# Altium PCB LM-CT-001.PcbDoc
Units mm, origin at the board's own origin, x right, y up, seen from the top; angles counter-clockwise.
Board outline 15 x 61.98 mm, 5 copper layers (Top Layer, Guard, Signal Layer 1, GND, Bottom Layer), stack 0.941 mm thick; 79 components, 63 nets, 279 pads, 15 vias.
Unrouted connection lines stored in the file: 200.
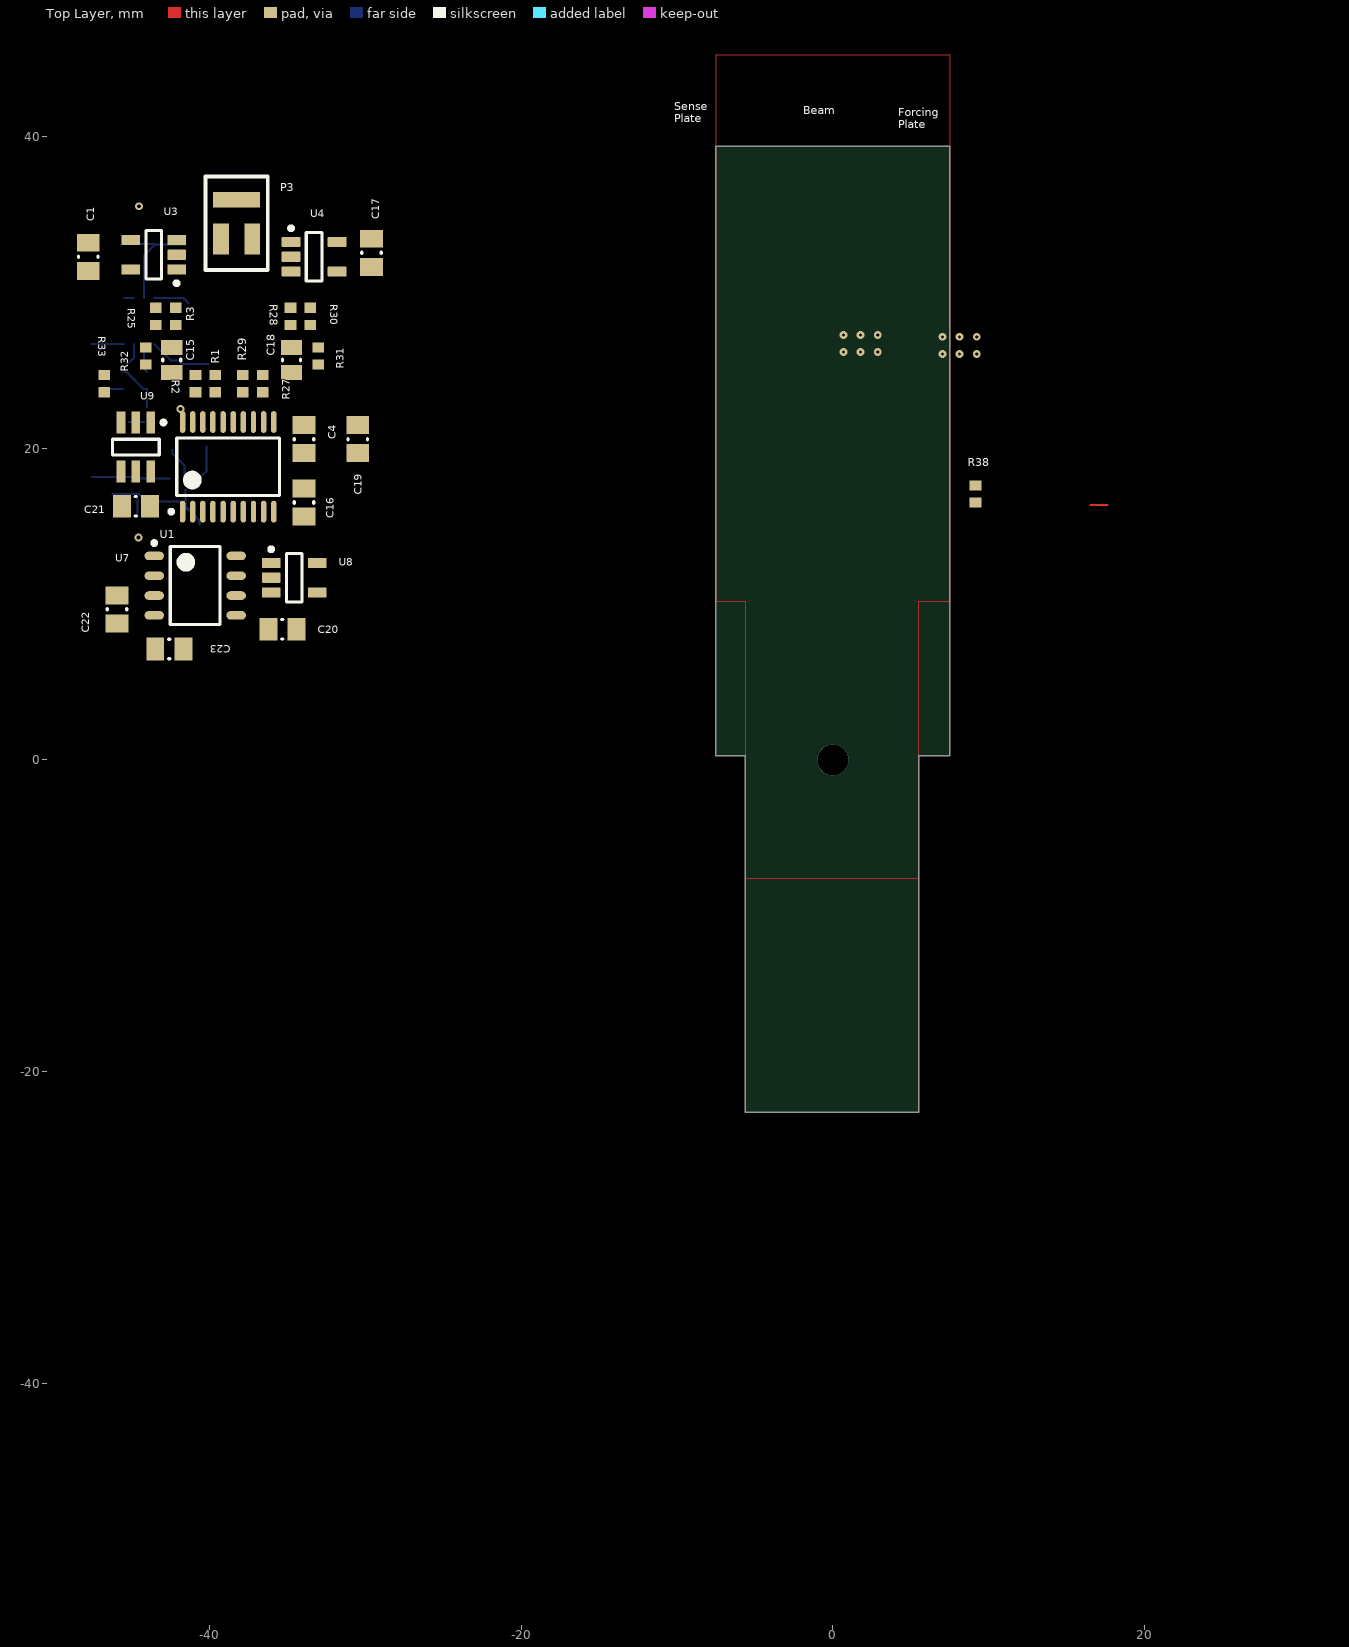
[diagram p0: Top Layer view]
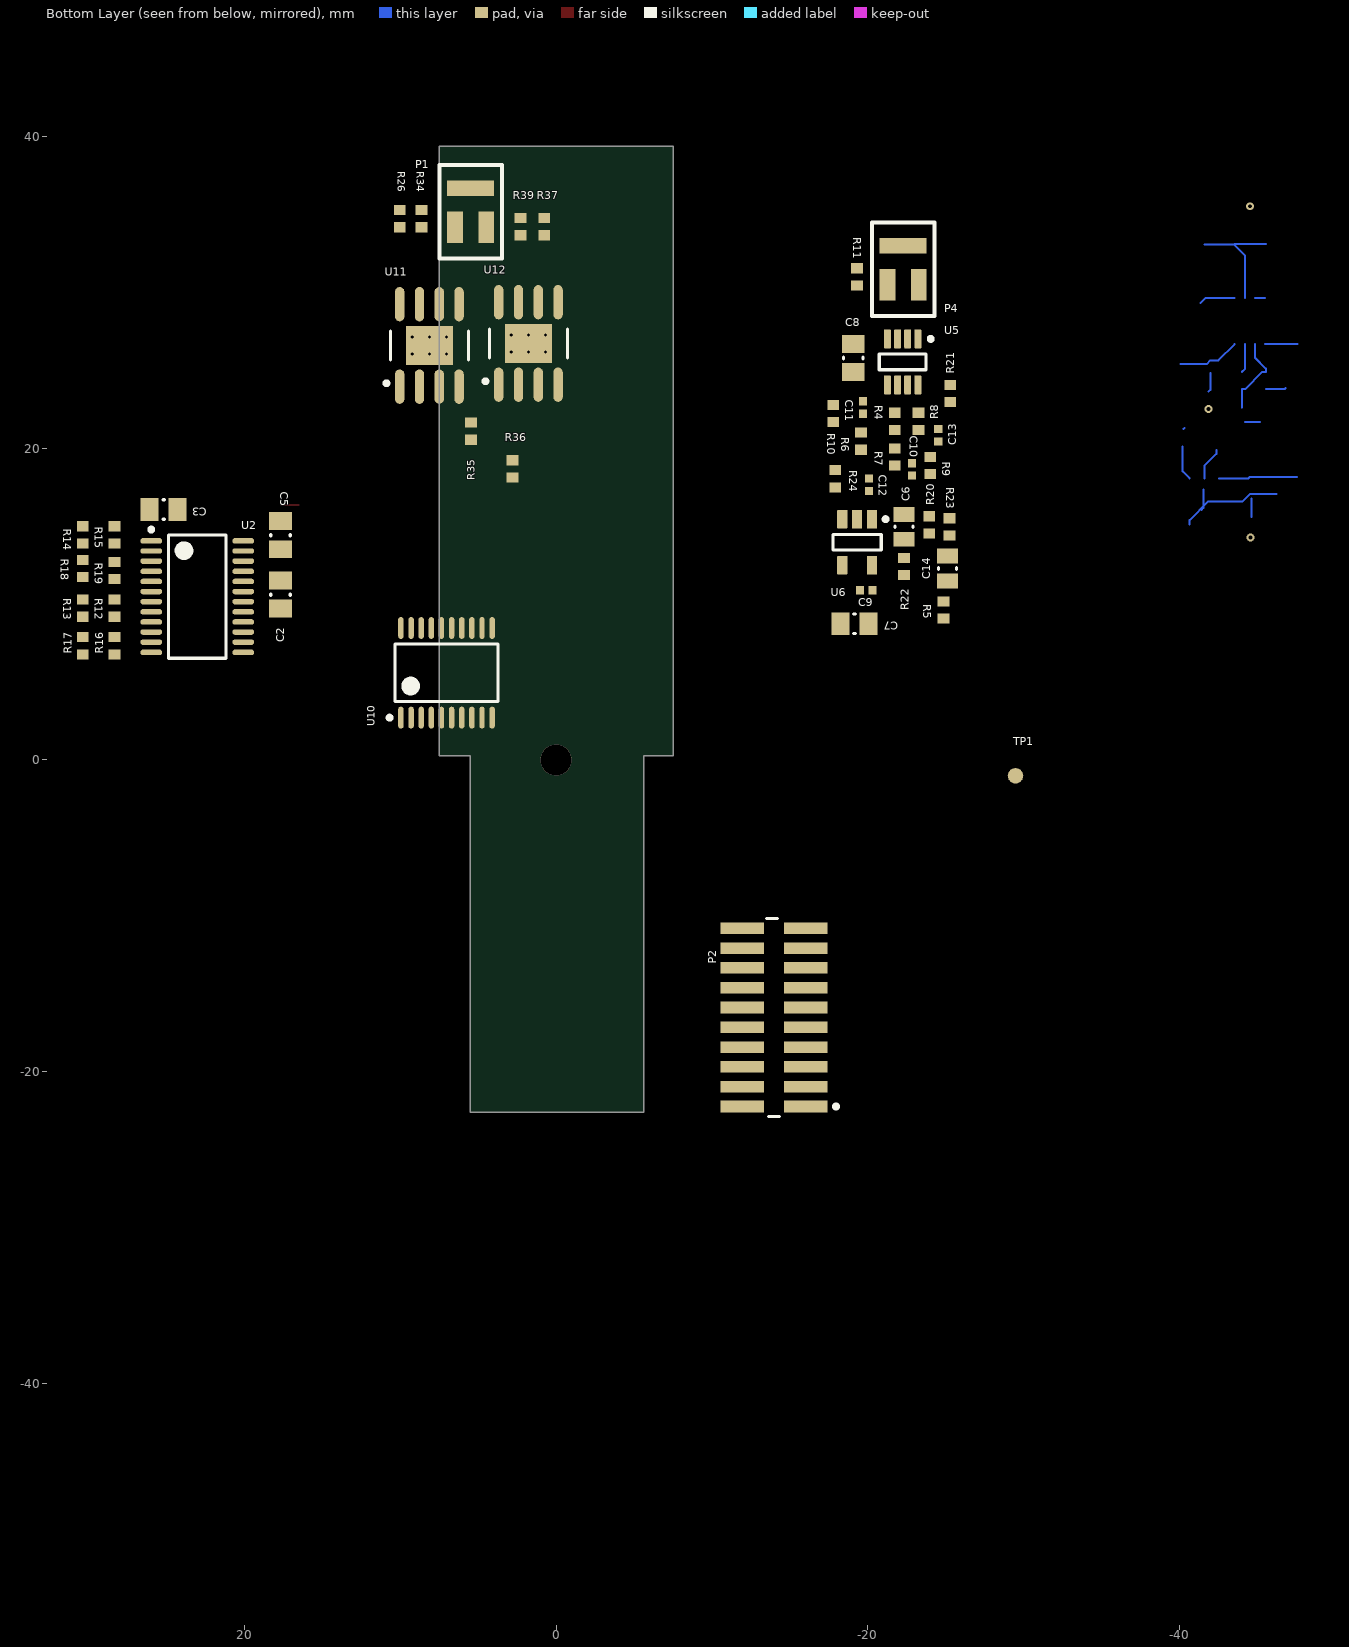
[diagram p1: Bottom Layer view, seen from below]
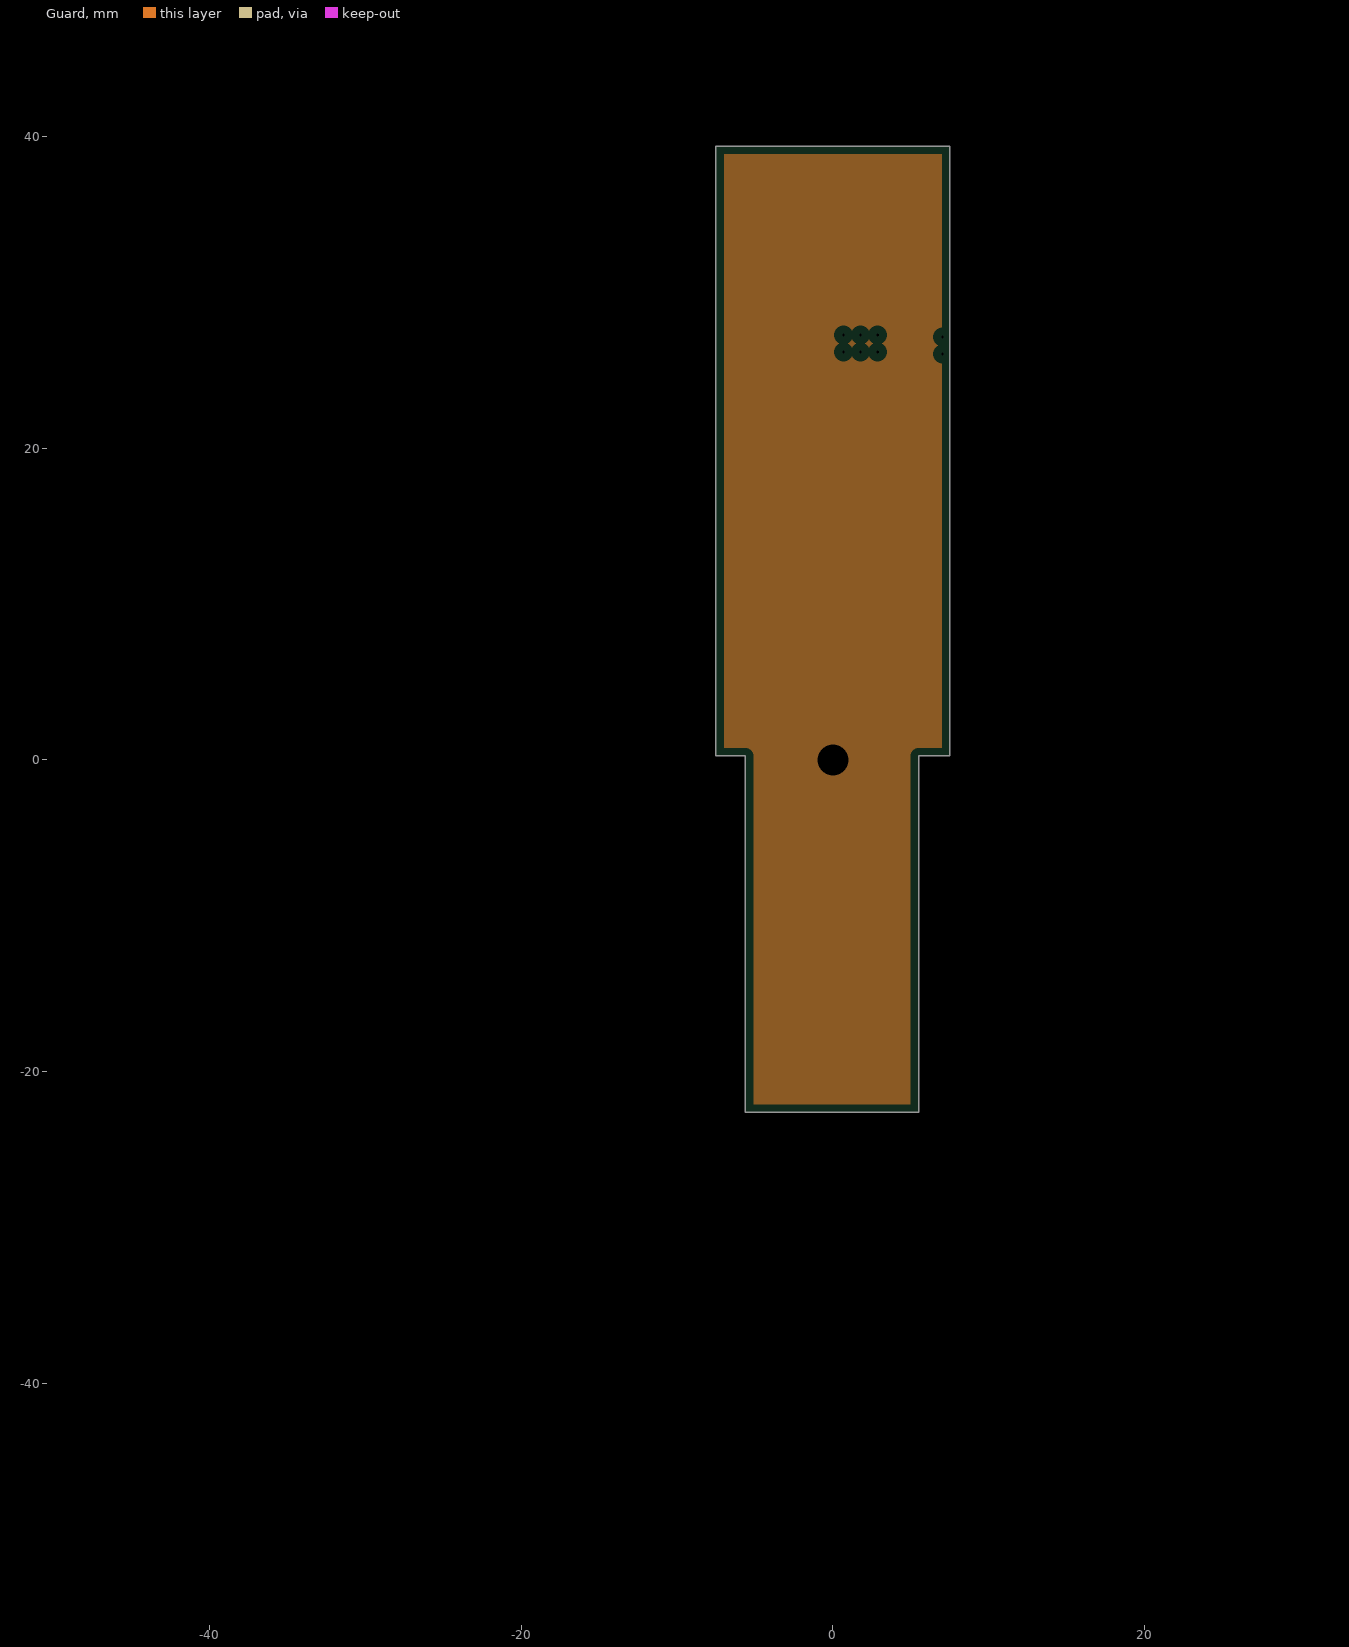
[diagram p2: Guard, clearances drawn from the general rule]
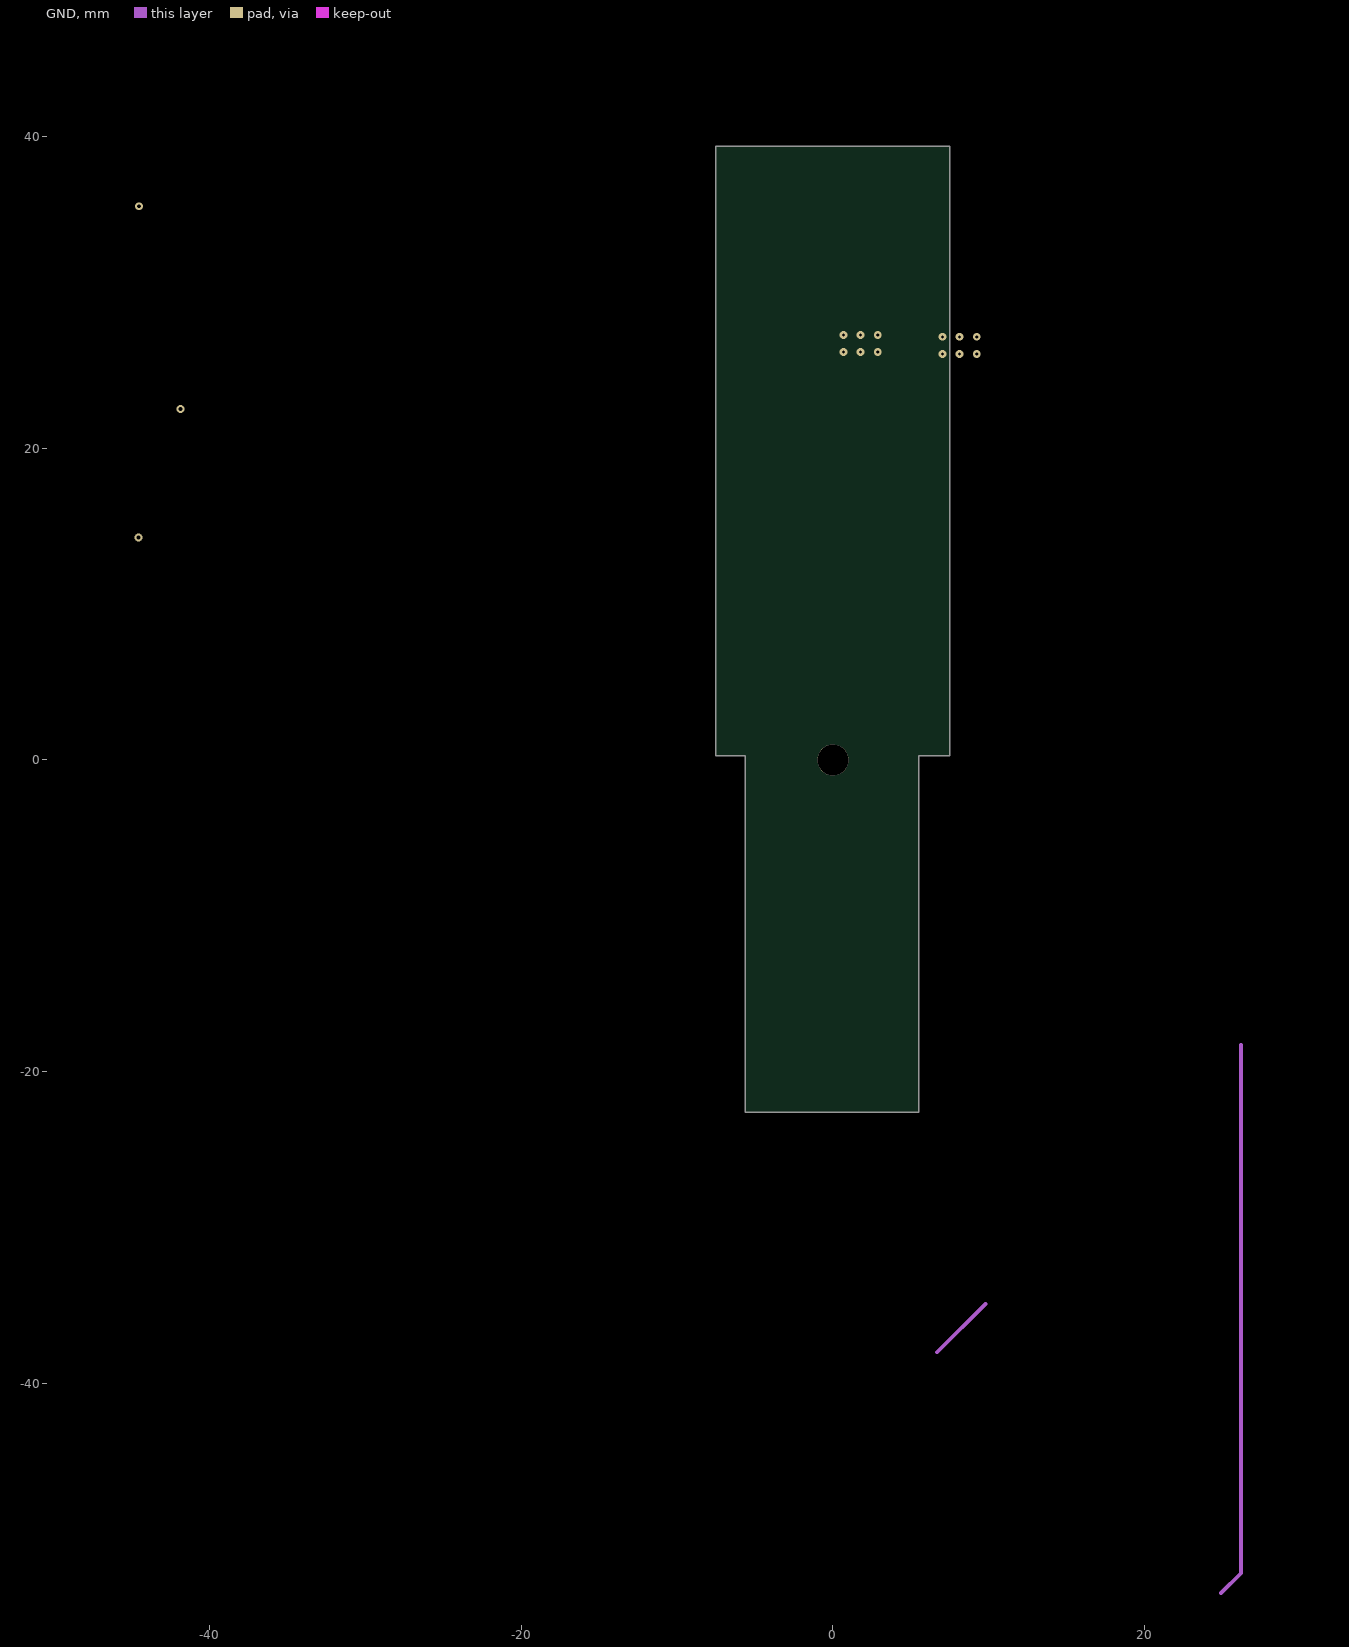
[diagram p3: GND]

## Layer stack, top to bottom
Top Solder: solder mask 0.0102, Solder Resist, Dk 3.5
Top Layer: signal copper 0.0356
Dielectric 1: core 0.254, FR-4, Dk 4.2
Guard: plane copper 0.036, net Guard
Dielectric 4: prepreg 0.127, Dk 4.2
Signal Layer 1: signal copper 0.036
Dielectric 3: core 0.254, Dk 4.2
GND: signal copper 0.036
Dielectric 2: prepreg 0.127, Dk 4.2
Bottom Layer: signal copper 0.0356
Bottom Solder: solder mask 0.0102, Solder Resist, Dk 3.5

## Board outline
7.5,0.254 5.494,0.254 5.494,-22.606 -5.606,-22.606 -5.606,0.254 -7.5,0.254 -7.5,39.37 7.5,39.37

## Design rules (kind name [scope] priority, off if disabled: settings)
Clearance [All] p1: gap=0.127 ignorepadtopadclearanceinfootprint=FALSE except(0: Arc-Hole Track-Hole SMDPad-Hole THPad-Hole Via-Hole Fill-Hole Poly-Hole Region-Hole Text-Hole)
DiffPairsRouting [All] p1: maxlimit=0.254 minlimit=0.254 mostfreqgap=0.254 toplayer_minwidth=0.381 toplayer_maxwidth=0.381 toplayer_prefwidth=0.381 midlayer1_minwidth=0.381 midlayer1_maxwidth=0.381 midlayer1_prefwidth=0.381 midlayer2_minwidth=0.381 midlayer2_maxwidth=0.381 midlayer2_prefwidth=0.381 bottomlayer_minwidth=0.381 bottomlayer_maxwidth=0.381 bottomlayer_prefwidth=0.381 maxuncoupledlength=12.7
HoleToHoleClearance [All] p1: gap=0.127 allowstackedmicrovias=TRUE
MinimumSolderMaskSliver [All] p1: minsoldermaskwidth=0.127
PlaneClearance [All] p1: clearance=0.508
PlaneConnect [All] p1: planeconnectstyle=Relief reliefexpansion=0.508 reliefentries=4 reliefconductorwidth=0.254 reliefairgap=0.254
PolygonConnect [All] p1: connectstyle=Relief reliefconductorwidth=0.254 reliefentries=4 polygonreliefangle="90 Angle" airgapwidth=0.254
RoomDefinition ZP_Force_Plates [InComponentClass('ZP_Force_Plates')] p1: confinementstyle=ConfineIn formatcopy=TRUE lockcomponents=FALSE outline -4.013,1.143 12.446,1.143 12.446,39.412 -4.013,39.412
RoomDefinition Synch_Demod [InComponentClass('Synch_Demod')] p2: confinementstyle=ConfineIn formatcopy=TRUE lockcomponents=FALSE outline -17.018,7.201 -26.162,7.201 -26.162,34.798 -17.018,34.798
RoomDefinition Sense_Plates [InComponentClass('Sense_Plates')] p3: confinementstyle=ConfineIn formatcopy=TRUE lockcomponents=FALSE outline -49.132,5.08 -27.94,5.08 -27.94,37.987 -49.132,37.987
RoomDefinition ADC [InComponentClass('ADC')] p4: confinementstyle=ConfineIn formatcopy=TRUE lockcomponents=FALSE outline 16.282,5.8 32.131,5.8 32.131,17.587 16.282,17.587
RoutingVias [All] p1: holewidth=0.254 width=0.508 viastyle="Through Hole" minholewidth=0.127 minwidth=0.254 maxholewidth=0.711 maxwidth=1.27
SilkToSolderMaskClearance [IsPad] p1: minsilkscreentomaskgap=0.127 clearancetoexposedcopper=TRUE
SolderMaskExpansion [All] p1: expansion=0.102
Width [All] p1: maxlimit=0.5 minlimit=0.127 preferedwidth=0.254 toplayer_prefwidth=0.127 midlayer2_maxwidth=0.254 bottomlayer_prefwidth=0.127 minimp=50.000000 maximp=50.000000 favimp=50.000000
24 further rules are at their usual default settings.

## Classes and differential pairs
component class Synch_Demod: C6 C7 C8 C9 C10 C11 C12 C13 C14 P2 P4 R4 R5 R6 R7 R8 R9 R10 R11 R20 R21 R22 R23 R24 TP1 U5 U6
component class ADC: C2 C3 C5 R12 R13 R14 R15 R16 R17 R18 R19 U2
component class Sense_Plates: C1 C4 C15 C16 C17 C18 C19 C20 C21 C22 C23 P3 R1 R2 R3 R25 R27 R28 R29 R30 R31 R32 R33 U1 U3 U4 U7 U8 U9
component class ZP_Force_Plates: P1 R26 R34 R35 R36 R37 R38 R39 U10 U11 U12
differential pair PLATE: +PLATE_P -PLATE_N

## Components (designator, comment, footprint, x,y, rotation, side; value= is the part's Value field where it differs from the comment)
C1 "CAP CER 0.1UF 25V X7R 0805" CAPC0805(2012)145_N -47.752,32.272 r90 top
C2 "CAP CER 0.1UF 25V X7R 0805" CAPC0805(2012)145_N 17.679,10.602 r90 bottom
C3 "CAP CER 0.1UF 25V X7R 0805" CAPC0805(2012)145_N 25.172,16.063 r0 bottom
C4 "CAP CER 0.1UF 25V X7R 0805" CAPC0805(2012)145_N -33.92,20.577 r90 top
C5 "CAP CER 0.1UF 25V X7R 0805" CAPC0805(2012)145_N 17.679,14.412 r270 bottom
C6 "470nF" CAPC0805(2012)75_L -22.31,14.948 r90 bottom
C7 "CAP CER 0.1UF 25V X7R 0805" CAPC0805(2012)145_N -19.135,8.725 r0 bottom
C8 "CAP CER 0.1UF 25V X7R 0805" CAPC0805(2012)145_N -19.05,25.781 r270 bottom
C9 "0.1uF" CAPC0402(1005)60_L -19.897,10.884 r180 bottom
C10 "0.1uF" CAPC0402(1005)60_L -22.818,18.631 r270 bottom
C11 "0.1uF" CAPC0402(1005)60_L -19.685,22.606 r90 bottom
C12 "0.1uF" CAPC0402(1005)60_L -20.066,17.653 r270 bottom
C13 "1uF" CAPC0402(1005)60_L -24.511,20.828 r90 bottom
C14 "22uF" CAPC0805(2012)75_L -25.104,12.281 r90 bottom
C15 "CAP CER 1UF 25V X7R 0805" CAPC0805(2012)155_L -42.401,25.654 r270 top
C16 "CAP CER 0.1UF 25V X7R 0805" CAPC0805(2012)145_N -33.92,16.513 r90 top
C17 "CAP CER 0.1UF 25V X7R 0805" CAPC0805(2012)145_N -29.591,32.526 r90 top
C18 "CAP CER 1UF 25V X7R 0805" CAPC0805(2012)155_L -34.72,25.654 r270 top
C19 "CAP CER 0.1UF 25V X7R 0805" CAPC0805(2012)145_N -30.48,20.577 r90 top
C20 "CAP CER 0.1UF 25V X7R 0805" CAPC0805(2012)145_N -35.306,8.385 r0 top
C21 "CAP CER 0.1UF 25V X7R 0805" CAPC0805(2012)145_N -44.704,16.259 r180 top
C22 "CAP CER 0.1UF 25V X7R 0805" CAPC0805(2012)145_N -45.911,9.655 r90 top
C23 "Multilayer Ceramic Capacitors MLCC - SMD/SMT 0.01uF 50volts 10% X7R" CAPC0805(2012)145_N -42.556,7.115 r180 top
P1 "Triax_Conn" Triax_Conn 6.483,34.166 r180 bottom
P2 "FTSH-110-01-L-DV" SMTC-FTSH-110-01-L-DV_V -13.97,-16.512 r90 bottom
P3 "Triax_Conn" Triax_Conn -39.243,33.415 r0 top
P4 "Triax_Conn" Triax_Conn -21.254,30.48 r180 bottom
R1 "4.02K" RESC0402(1005)_M -39.607,24.13 r270 top
R2 "7.5K" RESC0402(1005)_M -40.877,24.13 r90 top
R3 "0" RESC0402(1005)_M -42.147,28.448 r270 top
R4 "" RESC0402(1005)_M -21.717,21.717 r90 bottom
R5 "0" RESC0402(1005)_M -24.85,9.614 r90 bottom
R6 "100" RESC0402(1005)_M -19.558,20.447 r270 bottom
R7 "" RESC0402(1005)_M -21.717,19.431 r90 bottom
R8 "" RESC0402(1005)_M -23.241,21.717 r270 bottom
R9 "" RESC0402(1005)_M -24.003,18.881 r90 bottom
R10 "" RESC0402(1005)_M -17.78,22.225 r270 bottom
R11 "2.2M" RESC0402(1005)_M -19.304,30.988 r270 bottom
R12 "100K" RESC0402(1005)_M 28.321,9.737 r90 bottom
R13 "100K" RESC0402(1005)_M 30.353,9.737 r90 bottom
R14 "100K" RESC0402(1005)_M 30.353,14.436 r90 bottom
R15 "100K" RESC0402(1005)_M 28.321,14.436 r90 bottom
R16 "10K" RESC0402(1005)_M 28.321,7.324 r90 bottom
R17 "10K" RESC0402(1005)_M 30.353,7.324 r90 bottom
R18 "10K" RESC0402(1005)_M 30.353,12.277 r90 bottom
R19 "10K" RESC0402(1005)_M 28.321,12.15 r90 bottom
R20 "300K" RESC0402(1005)_M -23.941,15.075 r90 bottom
R21 "499K" RESC0402(1005)_M -25.273,23.495 r270 bottom
R22 "18.2K" RESC0402(1005)_M -22.31,12.408 r90 bottom
R23 "249K" RESC0402(1005)_M -25.231,14.948 r270 bottom
R24 "33K" RESC0402(1005)_M -17.907,18.034 r90 bottom
R25 "DNP" RESC0402(1005)_M -43.417,28.448 r270 top
R26 "10k" RESC0402(1005)_M 10.033,34.713 r90 bottom
R27 "7.5K" RESC0402(1005)_M -36.559,24.13 r90 top
R28 "DNP" RESC0402(1005)_M -34.781,28.448 r270 top
R29 "4.02K" RESC0402(1005)_M -37.846,24.13 r90 top
R30 "0" RESC0402(1005)_M -33.511,28.448 r270 top
R31 "1M" RESC0402(1005)_M -33.003,25.908 r90 top
R32 "1M" RESC0402(1005)_M -44.061,25.908 r90 top
R33 "43.2K" RESC0402(1005)_M -46.719,24.13 r270 top
R34 "100k" RESC0402(1005)_M 8.636,34.713 r270 bottom
R35 "10k" RESC0402(1005)_M 5.461,21.082 r90 bottom
R36 "100k" RESC0402(1005)_M 2.794,18.669 r90 bottom
R37 "100k" RESC0402(1005)_M 0.762,34.205 r90 bottom
R38 "3.9K" RESC0402(1005)_M 9.144,17.06 r90 top
R39 "100k" RESC0402(1005)_M 2.286,34.205 r90 bottom
TP1 "TP-SM-C-100" TP-SM-C-100 -29.464,-1.018 r180 bottom
U1 "MAX333AEUP+" TSOP65P640X90-20N -38.782,18.799 r90 top
U2 "MAX1300" MAX1300 23.013,10.475 r180 bottom
U3 "OPA188AIDBVR" DBV0005A_M -43.561,32.399 r180 top
U4 "OPA188AIDBVR" DBV0005A_M -33.274,32.272 r0 top
U5 "OPA2378AIDCNT" DCN0008A_M -22.225,25.527 r270 bottom
U6 "OPA188AIDBVR" DBV0005A_M -19.304,13.97 r270 bottom
U7 "LT1461CIS8-5#PBF" LT-S8-8_L -40.894,11.179 r0 top
U8 "OPA188AIDBVR" DBV0005A_M -34.544,11.687 r0 top
U9 "LTC6994MPS6-2#TRMPBF" LTC6994MPS6-2#TRMPBF -44.704,20.069 r270 top
U10 "MAX333AEUP+" TSOP65P640X90-20N 7.028,5.588 r90 bottom
U11 "OPA454AIDDAG4" TI-DDA8-2745X2245TP_N 8.128,26.585 r90 bottom
U12 "OPA454AIDDAG4" TI-DDA8-2745X2245TP_N 1.778,26.712 r90 bottom

## Footprints (in the part's own frame and the unit in brackets; to place one, negate y for a bottom-side part, rotate by r counter-clockwise, add the part's x,y. Pads: shape width x height; smd on the part's side, far side on the other; paste and mask are expansions set on the pad)
CAPC0402(1005)60_L [mm] "Chip Capacitor, Body 1.0x0.5mm, Height 0.6mm, IPC High Density"
  rect 0.52x0.52 smd: 1(-0.4,0) 2(0.4,0)
  body extent -0.55,-0.3 0.55,0.3, height 0.6
CAPC0805(2012)75_L [mm] "Chip Capacitor, Body 2.0x1.2mm, Height 0.75mm, IPC High Density"
  rect 0.95x1.35 smd: 1(-0.8,0) 2(0.8,0)
  silkscreen extent -0.05,-0.58 0.05,0.58, body extent -1.1,-0.72 1.1,0.72, height 0.75
CAPC0805(2012)145_N [mm] "Chip Capacitor, Body 2.0x1.2mm, Height 1.45mm, IPC Medium Density"
  rect 1.15x1.45 smd: 1(-0.9,0) 2(0.9,0)
  silkscreen extent -0.05,-0.62 0.05,0.63, body extent -1.1,-0.72 1.1,0.73, height 1.45
CAPC0805(2012)155_L [mm] "Chip Capacitor, Body 2.0x1.2mm, Height 1.55mm, IPC High Density"
  rect 0.95x1.35 smd: 1(-0.8,0) 2(0.8,0)
  silkscreen extent -0.05,-0.58 0.05,0.58, body extent -1.1,-0.72 1.1,0.72, height 1.55
DBV0005A_M [mm] "SOT23, 5-Leads, Body 3.05x1.75mm, Pitch 0.95mm, IPC Low Density"
  rrect15% 1.2x0.65 smd: 1(-1.475,0.95) 2(-1.475,0) 3(-1.475,-0.95) 4(1.475,-0.95) 5(1.475,0.95)
  silkscreen extent -1.6,-1.55 0.5,1.95, body extent -1.42,-1.46 1.42,1.46, height 1.08
DCN0008A_M [mm] "SOT23, 8-Leads, Body 3x1.75mm, Pitch 0.65mm, IPC Low Density"
  rrect22% 1.2x0.45 smd: 1(-1.475,0.975) 2(-1.475,0.325) 3(-1.475,-0.325) 4(-1.475,-0.975) 5(1.475,-0.975) 6(1.475,-0.325) 7(1.475,0.325) 8(1.475,0.975)
  silkscreen extent -1.6,-1.5 0.5,1.92, body extent -0.88,-1.5 0.87,1.5, height 1.45
LT-S8-8_L [mm] "SOIC, 8-Leads, Body 5x4mm, Pitch 1.27mm, IPC High Density"
  oval 1.25x0.55 smd: 1(-2.625,1.905) 2(-2.625,0.635) 3(-2.625,-0.635) 4(-2.625,-1.905) 5(2.625,-1.905) 6(2.625,-0.635) 7(2.625,0.635) 8(2.625,1.905)
  silkscreen extent -2.75,-2.5 1.6,2.85, body extent -3,-2.5 3,2.5, height 1.75
LTC6994MPS6-2#TRMPBF [mm] "SOT23, 6-Leads, Body 2.90x3.23mm, Pitch 0.95mm, IPC Medium Density"
  rect 1.4x0.55 smd: 1(-1.575,0.95) 2(-1.575,0) 3(-1.575,-0.95) 4(1.575,-0.95) 5(1.575,0) 6(1.575,0.95)
  silkscreen extent -1.7,-1.5 0.5,1.9, body extent -1.92,-1.5 1.92,1.5, height 1
MAX1300 [mm] "TSOP, 24-Leads, Body 7.80x4.40mm, Pitch 0.65mm, IPC Medium Density"
  oval 1.4x0.35 smd: 1(-2.95,3.575) 2(-2.95,2.925) 3(-2.95,2.275) 4(-2.95,1.625) 5(-2.95,0.975) 6(-2.95,0.325) 7(-2.95,-0.325) 8(-2.95,-0.975) 9(-2.95,-1.625) 10(-2.95,-2.275) 11(-2.95,-2.925) 12(-2.95,-3.575) 13(2.95,-3.575) 14(2.95,-2.925) 15(2.95,-2.275) 16(2.95,-1.625) 17(2.95,-0.975) 18(2.95,-0.325) 19(2.95,0.325) 20(2.95,0.975) 21(2.95,1.625) 22(2.95,2.275) 23(2.95,2.925) 24(2.95,3.575)
  silkscreen extent -3.08,-3.95 1.85,4.42, body extent -3.2,-3.95 3.2,3.95, height 1.1
RESC0402(1005)_M [mm] "Chip Resistor, Body 1.0x0.5mm, IPC Low Density"
  rect 0.65x0.75 smd: 1(-0.55,0) 2(0.55,0)
  body extent -0.52,-0.28 0.53,0.28, height 0.4
SMTC-FTSH-110-01-L-DV_V [mm] "CONN, 20-Leads, Body 12.7x3.43mm, Pitch 1.27mm"
  rect 0.74x2.79 smd: 1(-5.715,-2.035) 2(-5.715,2.035) 3(-4.445,-2.035) 4(-4.445,2.035) 5(-3.175,-2.035) 6(-3.175,2.035) 7(-1.905,-2.035) 8(-1.905,2.035) 9(-0.635,-2.035) 10(-0.635,2.035) 11(0.635,-2.035) 12(0.635,2.035) 13(1.905,-2.035) 14(1.905,2.035) 15(3.175,-2.035) 16(3.175,2.035) 17(4.445,-2.035) 18(4.445,2.035) 19(5.715,-2.035) 20(5.715,2.035)
  silkscreen extent -6.35,-4.1 6.35,0.47, body extent -6.35,-2.92 6.35,2.92, height 5.97
TI-DDA8-2745X2245TP_N [mm] "SOP, 8-Leads, Body 4.9x3.9mm, Pitch 1.27mm, Thermal Pad 2.745x2.245mm, IPC Medium Density"
  oval 2.2x0.6 smd: 1(-2.645,1.905) 2(-2.645,0.635) 3(-2.645,-0.635) 4(-2.645,-1.905) 5(2.645,-1.905) 6(2.645,-0.635) 7(2.645,0.635) 8(2.645,1.905)
  rect 2.49x3 smd: 9(0,0)
  silkscreen extent -2.55,-2.5 0.93,2.88, body extent -2,-2.5 2,2.5, height 1.7
TP-SM-C-100 [mm] "Test Point, Surface Mounting, Circular, Pad Diameter 1mm"
  round 1 smd: 1(0,0)
Triax_Conn [mm] "Triaxial pads for Conning Tower"
  rect 1x2 smd: 1(0,0) 2(2,0)
  rect 3x1 smd: 3(1,2.5)
  silkscreen extent -1,-2 3,4
TSOP65P640X90-20N [mm] "TSOP, 20-Leads, Body 6.50x4.40mm, Pitch 0.65mm, IPC Medium Density"
  oval 1.4x0.35 smd: 1(-2.875,2.925) 2(-2.875,2.275) 3(-2.875,1.625) 4(-2.875,0.975) 5(-2.875,0.325) 6(-2.875,-0.325) 7(-2.875,-0.975) 8(-2.875,-1.625) 9(-2.875,-2.275) 10(-2.875,-2.925) 11(2.875,-2.925) 12(2.875,-2.275) 13(2.875,-1.625) 14(2.875,-0.975) 15(2.875,-0.325) 16(2.875,0.325) 17(2.875,0.975) 18(2.875,1.625) 19(2.875,2.275) 20(2.875,2.925)
  silkscreen extent -3,-3.3 1.85,3.77, body extent -2.25,-3.3 2.25,3.3, height 0.9

## Part data
C1 C3 C4 C5 C7 C8 C16 C17 C19 C20 C21 C22: library part CMP-1036-04795-1, Capacitance=0.1µF, Manufacturer="Murata Electronics North America", Manufacturer Part Number=GRM21BR71E104KA01L, Operating Temperature="-55°C ~ 125°C", Package / Case="0805 (2012 Metric)", Ratings=-, Supplier Part Number 1=490-1673-6-ND, Temperature Coefficient=X7R, Tolerance=±10%, Voltage - Rated=25V, Applications="General Purpose", Category=Capacitors, ComponentLink1Description=http://www.murata.com/~/media/webrenewal/support/library/catalog/products/capacitor/mlcc/c02e.ashx, ComponentLink1URL=http://www.murata.com/~/media/webrenewal/support/library/catalog/products/capacitor/mlcc/c02e.ashx, Features=-, Height - Seated (Max)=-, Lead Spacing=-, Lead Style=-, Mounting Type="Surface Mount, MLCC", Packaging=Digi-Reel®, Part Status=Active, Pricing 1="1=0.2, 10=0.145, 100=0.0683, 500=0.04788, 1000=0.03964 (USD)", RoHS="RoHS Compliant", Size / Dimension="0.079\" L x 0.049\" W (2.00mm x 1.25mm)", Stock 1=891652, Supplier 1=Digi-Key, Thickness (Max)="0.053\" (1.35mm)"
C2: library part CMP-1036-04795-1, Capacitance=1µF, Manufacturer="Murata Electronics North America", Manufacturer Part Number=GRM21BR71E104KA01L, Operating Temperature="-55°C ~ 125°C", Package / Case="0805 (2012 Metric)", Ratings=-, Supplier Part Number 1=490-1673-6-ND, Temperature Coefficient=X7R, Tolerance=±10%, Voltage - Rated=25V, Applications="General Purpose", Category=Capacitors, ComponentLink1Description=http://www.murata.com/~/media/webrenewal/support/library/catalog/products/capacitor/mlcc/c02e.ashx, ComponentLink1URL=http://www.murata.com/~/media/webrenewal/support/library/catalog/products/capacitor/mlcc/c02e.ashx, Features=-, Height - Seated (Max)=-, Lead Spacing=-, Lead Style=-, Mounting Type="Surface Mount, MLCC", Packaging=Digi-Reel®, Part Status=Active, Pricing 1="1=0.2, 10=0.145, 100=0.0683, 500=0.04788, 1000=0.03964 (USD)", RoHS="RoHS Compliant", Size / Dimension="0.079\" L x 0.049\" W (2.00mm x 1.25mm)", Stock 1=891652, Supplier 1=Digi-Key, Thickness (Max)="0.053\" (1.35mm)"
C6: library part CMP-1036-02117-1, "CAP CER 0.47UF 25V X7R 0805", Manufacturer="Murata Electronics North America", Manufacturer Part Number=GRM219R71E474KA88D, Operating Temperature="-55°C ~ 125°C", Package / Case="0805 (2012 Metric)", Ratings=-, Supplier Part Number 1=490-11584-1-ND, Temperature Coefficient=X7R, Tolerance=±10%, Voltage - Rated=25V, Applications="General Purpose", Category=Capacitors, ComponentLink1Description=https://www.murata.com/~/media/webrenewal/support/library/catalog/products/capacitor/mlcc/c02e.ashx?la=en-us, ComponentLink1URL=https://www.murata.com/~/media/webrenewal/support/library/catalog/products/capacitor/mlcc/c02e.ashx?la=en-us, Features=-, Height - Seated (Max)=-, Lead Spacing=-, Lead Style=-, Mounting Type="Surface Mount, MLCC", Packaging="Cut Tape (CT)", Part Status=Active, Pricing 1="1=0.38, 10=0.262, 100=0.1573, 500=0.118, 1000=0.09964 (USD)", RoHS="RoHS Compliant", Size / Dimension="0.079\" L x 0.049\" W (2.00mm x 1.25mm)", Stock 1=410, Supplier 1=Digi-Key, Thickness (Max)="0.037\" (0.95mm)"
C9 C10 C11 C12 C13: library part CMP-1034-00252-1, "CAP CER 0.1UF 10V X7R 0402", Manufacturer="Murata Electronics North America", Manufacturer Part Number=GRM155R71A104KA01D, Operating Temperature="-55°C ~ 125°C", Package / Case="0402 (1005 Metric)", Ratings=-, Supplier Part Number 1=490-6321-1-ND, Temperature Coefficient=X7R, Tolerance=±10%, Voltage - Rated=10V, Applications="General Purpose", Category=Capacitors, ComponentLink1Description=http://www.murata.com/~/media/webrenewal/support/library/catalog/products/capacitor/mlcc/c02e.ashx?la=en-us, ComponentLink1URL=http://www.murata.com/~/media/webrenewal/support/library/catalog/products/capacitor/mlcc/c02e.ashx?la=en-us, Features=-, Height - Seated (Max)=-, Lead Spacing=-, Mounting Type="Surface Mount, MLCC", Packaging="Cut Tape (CT)", Part Status=Active, Pricing 1="1=0.1, 10=0.014, 100=0.0063, 500=0.00446, 1000=0.00351, 2500=0.00319, 5000=0.00293 (USD)", RoHS="RoHS Compliant", Size / Dimension="0.039\" L x 0.020\" W (1.00mm x 0.50mm)", Stock 1=2920395, Supplier 1=Digi-Key, Thickness (Max)="0.022\" (0.55mm)"
C14: library part CMP-1036-02117-1, "CAP CER 22UF 25V X5R 0805", Manufacturer="Murata Electronics North America", Manufacturer Part Number=GRM21BR61E226ME44L, Operating Temperature="-55°C ~ 85°C", Package / Case="0805 (2012 Metric)", Ratings=-, Supplier Part Number 1=490-10749-1-ND, Temperature Coefficient=X5R, Tolerance=±20%, Voltage - Rated=25V, Applications="General Purpose", Category=Capacitors, ComponentLink1Description=http://search.murata.co.jp/Ceramy/image/img/A01X/G101/ENG/GRM21BR61E226ME44-01.pdf, ComponentLink1URL=http://search.murata.co.jp/Ceramy/image/img/A01X/G101/ENG/GRM21BR61E226ME44-01.pdf, Features=-, Height - Seated (Max)=-, Lead Spacing=-, Lead Style=-, Mounting Type="Surface Mount, MLCC", Notification="Current market demand for these product types have resulted in fluctuating and extending lead times. Lead times may differ.", Packaging="Cut Tape (CT)", Part Status=Active, Pricing 1="1=0.57, 10=0.404, 100=0.2663, 500=0.19722, 1000=0.16764 (USD)", RoHS="RoHS Compliant", Size / Dimension="0.079\" L x 0.049\" W (2.00mm x 1.25mm)", Stock 1=2004, Supplier 1=Digi-Key, Thickness (Max)="0.057\" (1.45mm)"
C15 C18: library part CMP-1036-04882-1, Capacitance=220pF, Manufacturer="Murata Electronics North America", Manufacturer Part Number=GRM21BR71E105KA99L, Operating Temperature="-55°C ~ 125°C", Package / Case="0805 (2012 Metric)", Ratings=-, Supplier Part Number 1=490-6484-6-ND, Temperature Coefficient=X7R, Tolerance=±10%, Voltage - Rated=25V, Applications="General Purpose", Category=Capacitors, ComponentLink1Description=http://www.murata.com/~/media/webrenewal/support/library/catalog/products/capacitor/mlcc/c02e.ashx, ComponentLink1URL=http://www.murata.com/~/media/webrenewal/support/library/catalog/products/capacitor/mlcc/c02e.ashx, Features=-, Height - Seated (Max)=-, Lead Spacing=-, Lead Style=-, Mounting Type="Surface Mount, MLCC", Packaging=Digi-Reel®, Part Status=Active, Pricing 1="1=0.14, 10=0.099, 100=0.0468, 500=0.0328, 1000=0.02715 (USD)", RoHS="RoHS Compliant", Size / Dimension="0.079\" L x 0.049\" W (2.00mm x 1.25mm)", Stock 1=295074, Supplier 1=Digi-Key, Thickness (Max)="0.053\" (1.35mm)"
C23: library part CMP-1036-04795-1, Capacitance=10nF, Case/Package=0805, Case Code (Metric)=2012, Dielectric=X7R, Dielectric Material=Ceramic, Manufacturer=Kemet, Manufacturer Part Number=C0805C103K5RACAUTO, Max Operating Temperature=125°C, Min Operating Temperature=-55°C, Package Quantity=1, Supplier Part Number 1=399-6924-1-ND, Tolerance=10%, Voltage Rating=50V, Case Code (Imperial)=0805, ComponentLink1Description=https://datasheet.ciiva.com/22700/1693454-22700519.pdf, ComponentLink1URL=https://datasheet.ciiva.com/22700/1693454-22700519.pdf, ComponentLink2Description=https://datasheet.ciiva.com/7842/1693454-7842175.pdf, ComponentLink2URL=https://datasheet.ciiva.com/7842/1693454-7842175.pdf, Contact Plating=Tin, Depth=1.25mm, Height=0.78mm, Length=2mm, Mount="Surface Mount", Packaging="Tape and Reel", Pricing 1="1=0.12, 10=0.087, 100=0.041, 500=0.0287, 1000=0.0238 (USD)", Radiation Hardening=No, REACH SVHC="No SVHC", Stock 1=63236, Supplier 1=Digi-Key, Termination=SMD/SMT, Thickness=0.035inch, Voltage Rating (DC)=50V, Width=0.049inch
P2: library part CMP-2000-06294-2, "Male Header, Pitch 1.27 mm, 2 x 10 Position, Height 6.1 mm, -55 to 125 degC, RoHS, Tube", Color=Black, Manufacturer=Samtec, Package Description="Male Header, Pitch 1.27 mm, 2 x 10 Position, Height 6.1 mm", Standard Package=1, Catalog Drawings=FTSHSeriesFTSHSeriesSMTSide, Category=Connectors,Interconnects, Connector Type=Header,Unshrouded, Contact Finish=Gold, Contact Finish Thickness=10µin(0.25µm), Contact Type=MalePin, Datasheet URL=http://suddendocs.samtec.com/catalog_english/ftsh_smt.pdf, Datasheet Version="F-215 , 02/2016", EDA / CAD Models=DownloadfromAcceleratedDesigns, Family=RectangularConnectors-Headers,MalePins, Fastening Type=-, Featured Product=Board-To-BoardInterconnectSystems, Features=-, Manufacturer URL=http://www.samtec.com/, Mounting Technology=SurfaceMount, Mounting Type=SurfaceMount, Number of Positions=20, Number of Positions Loaded=All, Number of Rows=2, Online Catalog=FTSHSeries, Other Names=SAM1161-10, Package Reference=FTSH-110-01-L-DV, Package URL=http://suddendocs.samtec.com/prints/ftsh-1xx-xx-xxx-dv-xxx-xxx-mkt.pdf, Packaging=Bulk, Product Training Modules=Board-to-BoardConnectors, Series=FTSH, Termination=Solder
R1 R2 R3 R4 R5 R6 R7 R8 R9 R10 R11 R12 R13 R14 R15 R16 R17 R18 R19 R20 R21 R22 R23 R24 R25 R26 R27 R28 R29 R30 R31 R32 R33 R34 R35 R38 R39: library part CMP-1011-00463-1
R36 R37: library part CMP-1011-00651-1
TP1: library part CMP-0484-00002-2, "Test Point, Surface Mount, Circular, Pad Diameter 1 mm", Manufacturer="No Vendor", PartNumber=TP-SM-C-100
U1 U10: library part MAX333CWP+, "IC SWITCH QUAD SPDT 20TSSOP", Base Part Number=MAX333, Channel Capacitance (CS(off), CD(off))=5pF, Current - Leakage (IS(off)) (Max)=250pA, Manufacturer="Maxim Integrated", On-State Resistance (Max)="45 Ohm", Operating Temperature="-40°C ~ 85°C (TA)", Package / Case="20-TSSOP (0.173\", 4.40mm Width)", Supplier Device Package=20-TSSOP, Supplier Part Number 1=MAX333AEUP+-ND, Voltage - Supply, Dual (V±)="±4.5 V ~ 20 V", Voltage - Supply, Single (V+)="10 V ~ 30 V", -3db Bandwidth=-, Category="Integrated Circuits (ICs)", Channel-to-Channel Matching (&Delta;Ron)="2 Ohm (Max)", Charge Injection=2pC, ComponentLink1Description=https://pdfserv.maximintegrated.com/en/ds/MAX333A.pdf, ComponentLink1URL=https://pdfserv.maximintegrated.com/en/ds/MAX333A.pdf, Crosstalk="-78dB @ 1MHz", Manufacturer Part Number=MAX333AEUP+, Multiplexer/Demultiplexer Circuit=2:1, Packaging=Tube, Part Status=Active, Pricing 1="1=6.77, 10=6.432, 25=6, 50=5.8942 (USD)", RoHS="RoHS Compliant", Stock 1=1328, Supplier 1=Digi-Key, Switch Circuit=SPDT, Switch Time (Ton, Toff) (Max)="175ns, 145ns"
U3 U4 U6 U8: library part CMP-0809-00005-2, "Precision, Low Noise, Rail-to-Rail Output, Zero-Drift Operational Amplifier, 4 to 36 V, -40 to 125 degC, 5-pin SOT23 (DBV5), Green (RoHS & no Sb/Br)", Manufacturer="Texas Instruments", Rating=Catalog, Total Supply Voltage(Max)(+5V is 5, +/-5V is 10)=36, Total Supply Voltage(Min)(+5V is 5, +/-5V is 10)=4, CMRR(Min)(dB)=120, Code_JEDEC=MO-178, ComponentLink1Description="Manufacturer URL", ComponentLink1URL=http://www.ti.com/, ComponentLink2Description=Datasheet, ComponentLink2URL=http://www.ti.com/lit/ds/symlink/opa188.pdf, ComponentLink3Description="Package Specification", ComponentLink3URL=http://www.ti.com/litv/pdf/mpds018i, DatasheetVersion=SBOS642A, Eco-Plan="Green (RoHS & no Sb/Br)", GBW(Typ)(MHz)=2, Iq per channel(Max)(mA)=0.51, Mounting Technology="Surface Mount", Number of Channels=1, Offset Drift(Typ)(uV/C)=0.03, PackageDescription="5-Pin Plastic Small Outline, Body 1.6 x 2.9 mm, Pitch 0.95 mm", PackageReference=DBV0005A, PackageVersion="4073253-4/K, 03/2006", PartNumber=OPA188AIDBVR, Slew Rate(Typ)(V/us)=0.8, SubFamily="Zero Drift Precision Amplifier"
U5: library part CMP-0272-01124-3, "Low-Noise, 900 kHz, RRIO, Precision Operational Amplifier, Zero-Drift Series, 2.2 to 5.5 V, -40 to 125 degC, 8-pin SOP (DCN8), Green (RoHS & no Sb/Br)", Manufacturer="Texas Instruments", Total Supply Voltage(Max)(+5V is 5, +/-5V is 10)=5.5, Total Supply Voltage(Min)(+5V is 5, +/-5V is 10)=2.2, CMRR(Min)(dB)=100, Code_JEDEC=MO-178, ComponentLink1Description="Manufacturer URL", ComponentLink1URL=http://www.ti.com/, ComponentLink2Description=Datasheet, ComponentLink2URL=http://www.ti.com/general/docs/lit/getliterature.tsp?genericPartNumber=OPA2378&fileType=pdf, ComponentLink3Description="Package Specification", ComponentLink3URL=http://www.ti.com/lit/ml/mpds099c/mpds099c.pdf, DatasheetVersion=SBOS417D, Eco-Plan="Green (RoHS & no Sb/Br)", IIB(Max)(pA)=550, Iq per channel(Max)(mA)=0.15, Mounting Technology="Surface Mount", Number of Channels=2, Offset Drift(Typ)(uV/C)=0.25, PackageDescription="8-Pin Plastic Small Outline, Body 1.6 x 2.9 mm, Pitch 0.65 mm", PackageReference=DCN0008A, PackageVersion="4202106/D, 11/2009", PartId=1, PartNumber=OPA2378AIDCNT, Slew Rate(Typ)(V/us)=0.4, Sub Family="Low Offset Voltage Amplifier (<=500uV), Low Power Amp (<=500uA), Low Supply Voltage Amplifier (<=2.7V), Precision Amplifier, Zero Drift Precision Amplifier", Vio (25C)(Max)(mV)=0.07, Vn at 1kHz(Typ)(nV/rtHz)=20
U7: library part CMP-2000-06607-1, "Micropower Precision Low Dropout Voltage Reference, 5 V, -40 to 85 degC, 8-Pin SOIC, RoHS, Tube", Current - Cathode=-, Current - Output=100mA, Current - Quiescent=50µA, Manufacturer="Linear Technology", Operating Temperature=-40°C~85°C, Package Description="8-Pin Plastic Small Outline (Narrow .150 Inch), Body 4.9 x 3.9 mm, Pitch 1.27 mm", Package Reference=S8, Package Version=0, Standard Package=100, Supplier Device Package=8-SOIC, Temperature Coefficient=12ppm/°C, Tolerance=±0.08%, Voltage - Input=5.5V~20V, Voltage - Output=5V, Category=IntegratedCircuits(ICs), Datasheet URL=http://cds.linear.com/docs/en/datasheet/1461fb.pdf, Datasheet Version="Rev. B, 09/2015", Dynamic Catalog=Series,Fixed-LinearTechnology, Family=PMIC-VoltageReference, Manufacturer URL=http://www.linear.com/, Mounting Technology=SurfaceMount, Mounting Type=SurfaceMount, Number of Channels=1, Package URL=http://cds.linear.com/docs/Packaging/05081610_G_SO8.pdf, Packaging=Tube, PartId=1, Product Training Modules=VoltageReferenceBasics, Reference Type=Series,Precision, Series=-
U9: "IC DELAY BLOCK 8TAP PROG TSOT23", Base Part Number=LTC6994, Manufacturer="Linear Technology/Analog Devices", Manufacturer Part Number=LTC6994CS6-2#TRMPBF, Operating Temperature="0°C ~ 70°C", Package / Case="SOT-23-6 Thin, TSOT-23-6", Supplier Device Package=TSOT-23-6, Supplier Part Number 1=LTC6994CS6-2#TRMPBFCT-ND, Voltage - Supply="2.25 V ~ 5.5 V", Available Total Delays="1µs ~ 33.6s", Category="Integrated Circuits (ICs)", ComponentLink1Description=http://www.linear.com/docs/29725, ComponentLink1URL=http://www.linear.com/docs/29725, Delay to 1st Tap=-, Function=Programmable, Mounting Type="Surface Mount", Packaging="Cut Tape (CT)", Part Status=Active, Pricing 1="1=3.42, 25=3.0496, 100=1.9217, 250=1.76156 (USD)", RoHS="RoHS Compliant", Stock 1=1401, Supplier 1=Digi-Key
U11 U12: library part CMP-0017-00715-1, "High Voltage (100V), High-Current (50mA) Operational Amplifier, G=1 Stable, 10 to 100 V, -55 to 125 degC, 8-pin SOP (DDA8), Green (RoHS & no Sb/Br)", Manufacturer="Texas Instruments", Rating=Catalog, Total Supply Voltage(Max)(+5V is 5, +/-5V is 10)=100, Total Supply Voltage(Min)(+5V is 5, +/-5V is 10)=10, CMRR(Min)(dB)=100, Code_JEDEC=MS-012, ComponentLink1Description="Manufacturer URL", ComponentLink1URL=http://www.ti.com/, ComponentLink2Description=Datasheet, ComponentLink2URL=http://www.ti.com/lit/ds/symlink/opa454.pdf, ComponentLink3Description="Package Specification", ComponentLink3URL=http://www.ti.com/litv/pdf/mpds092e, DatasheetVersion=SBOS391A, Eco-Plan="Green (RoHS & no Sb/Br)", GBW(Typ)(MHz)=2.5, IIB(Max)(pA)=100, Iq per channel(Max)(mA)=4, Mounting Technology="Surface Mount", Number of Channels=1, Offset Drift(Typ)(uV/C)=1.6, PackageDescription="8-Pin PowerPAD(TM) Plastic Small Outline, Body 3.9 x 4.9 mm, Pitch 1.27 mm", PackageReference=DDA8-2745X2245TP, PackageVersion="4202561/F, 12/2011", PartNumber=OPA454AIDDAG4, Slew Rate(Typ)(V/us)=13, Sub Family="General Purpose Amplifier, High Output Current Amplifier (>=50mA), High Supply Voltage Amplifier (>=30V), Precision Amplifier", Vio (25C)(Max)(mV)=4, Vn at 1kHz(Typ)(nV/rtHz)=47

## Free pads (board coordinates)
  round 2 hole 2: 7(0,0)

## Via types
v1: diameter 0.5, hole 0.2, Top Layer to Bottom Layer, 12 vias
v2: diameter 0.5, hole 0.25, Top Layer to Bottom Layer, 3 vias

## Nets (pads, with @x,y where several pads share a name; then routed paths per layer and width w, separated by ;. In a path a pad name is that pad's centre, name@x,y a point inside that pad or via, vN(x,y) a via of type N, cw(c..) or ccw(c..) an arc to the next point about the centre after c; other vN are vias at no path point)
+3.3: C21.1 U2.17 U2.18 U9.5
+5: C3.2 C5.2 C7.1 C9.2 P2.4 R21.1 U2.1 U2.22 U5.8 U6.5 | length 2.1
  Bottom Layer w0.127: -47.547,26.662 -45.481,26.662 -45.474,26.669
+5R: U1.12 U1.17 U8.1 U8.4
+12: C1.1 C4.2 C17.2 C19.2 U1.16 U3.5 U4.5 U7.2 U8.5 U10.16
-5: C8.1 C12.2 C16.1 P2.3 U1.5 U5.4 U6.2 U10.5 | length 4.5
  Bottom Layer w0.127: -43.524,29.619 -41.645,29.619 -41.324,29.298 ; -42.34,19.87 -42.34,19.635 -41.578,18.873 -41.578,18.062
"Beam Sync Demod Out": C14.2 R21.2 R23.2 U2.2 | length 1.4
  Bottom Layer w0.127: -41.519,17.353 -41.519,16.163 -41.392,16.036
Beam_In: P4.1 P4.2 R11.2 U5.3 | length 7.7
  Bottom Layer w0.127: -45.528,33.097 -43.528,33.097 -43.486,33.055 ; -44.174,29.619 -44.174,32.367 -43.486,33.055 ; -41.578,33.055 -43.486,33.055
Beam_mod: R22.1 U1.3
  other v2: -44.528,14.263
"Bottom Forcing Plate Sense": R37.2 R39.2
Bottom_Forcing_Plate: P1.2 R14.2 R37.1 U12.6
CT_CS0: P2.5
DAC_OUT: P2.14 U10.14 U10.19
FB_CS0: U2.10
GND: C1.2 C3.1 C4.1 C5.1 C7.2 C8.2 C9.1 C12.1 C13.1 C14.1 C16.2 C17.1 C21.2 C23.2 P2.1 P2.2 R9.2 R10.2 R11.1 R16.1 R17.1 R18.1 R19.1 R24.2 R26.1 R31.1 R32.1 R33.1 R35.1 R38.1 U1.2 U1.6 U1.7 U1.8 U1.9 U1.10 U1.14 U1.19 U2.15 U2.16 U2.21 U2.23 U2.24 U3.2 U4.2 U7.4 U8.2 U9.2 U9.4 U10.6 U10.12 U10.17 U11.4 U12.4
Guard: P1.3 P3.3 P4.3 pad.7 R6.2
  other v2: -41.832,22.514 -44.499,35.51
NetC2_1: C2.1 U2.19
NetC2_2: C2.2 U2.20
NetC6_1: C6.1 R20.1 R22.2 U6.4 | length 7.7
  Bottom Layer w0.127: -46.215,17.053 -44.499,17.053 -44.033,16.587 -41.832,16.587 -40.628,15.383 -40.628,15.112 ; -44.584,15.575 -44.584,16.765
NetC6_2: C6.2 R20.2 R23.1 U6.1 | length 5
  Bottom Layer w0.127: -47.505,18.153 -44.499,18.153 -44.408,18.062 -42.528,18.062
NetC10_1: C10.1 R7.1 | length 1
  Bottom Layer w0.127: -45.134,21.686 -44.179,21.686
NetC11_1: C11.1 R6.1 U5.1 U5.2 | length 1.9
  Bottom Layer w0.127: -45.474,29.619 -44.824,29.619 ; -41.959,24.823 -41.959,23.741 -41.832,23.614
NetC11_2: C11.2 R10.1 U5.5 | length 4
  Bottom Layer w0.127: -43.524,26.669 -42.478,25.623 -41.959,25.623 -41.728,25.392 -40.054,25.392
NetC13_2: C13.2 R8.2 | length 1.3
  Bottom Layer w0.127: -46.785,23.845 -46.724,23.784 -45.515,23.784
NetC15_1: C15.1 R3.2 R25.2 R32.2
NetC15_2: C15.2 R1.1 R2.2
NetC18_1: C18.1 R28.2 R30.2 R31.2
NetC18_2: C18.2 R27.1 R29.2
NetP2_10: P2.10 R2.1
NetP2_12: P2.12 R27.2
NetR1_2: R1.2 U1.18
NetR4_1: R4.1 R7.2 R8.1 U5.7 | length 5.2
  Bottom Layer w0.127: -44.824,26.669 -44.824,25.787 -45.515,25.096 -45.515,24.884 -45.303,24.884 -44.203,23.784 -43.991,23.784 -43.991,22.598
NetR4_2: R4.2 U5.6 | length 1.9
  Bottom Layer w0.127: -44.174,26.669 -44.174,25.067 -43.991,24.884
NetR24_1: R24.1 U6.3 | length 2.2
  Bottom Layer w0.127: -40.628,18.062 -40.181,18.509 -40.181,20.101
NetR26_2: R26.2 R34.1 U11.2
NetR29_1: R29.1 U1.13
NetR33_2: R33.2 U9.3
NetR35_2: R35.2 R39.1 U12.2
NetR38_2: R38.2 U10.11 U10.20
NetU7_6: U7.6 U8.3
NetU10_13: U10.13 U12.3
NetU10_18: U10.18 U11.3
PLATE_N: P3.1 R3.1 R13.2 R28.1 U3.1 U3.3 U3.4
PLATE_N_F: P2.20
PLATE_N_S: P2.18
PLATE_P: P3.2 R12.2 R25.1 R30.1 U4.1 U4.3 U4.4
PLATE_P_F: P2.17
PLATE_P_S: P2.19
PWM2B: U1.11 U1.20 U9.1
PWM2B_DELAY: U9.6
Raw_Beam: C10.2 R9.1 U1.4 | length 1.2
  Top Layer w0.127: 16.525,16.34 17.606,16.34
  Bottom Layer w0.127: -40.291,21.286 -40.229,21.224
S1: R12.1 R16.2 U2.6
S2: R14.1 R18.2 U2.3
S3: R13.1 R17.2 U2.5
S4: R15.1 R19.2 U2.4
SPI0_MISO: P2.9 U2.14
SPI0_MOSI: P2.11
SPI0_SCLK: P2.7 U2.13
SPIO_MOSI: U2.11
SSTRB: U2.12
Sync_clk: P2.6 R5.2 U1.1
"Top Forcing Plate Force": R36.2 U11.6
Top_Forcing_Plate: P1.1 R15.2 R34.2 R36.1
ZP: P2.13 U11.7 U12.7
pads on no net: C19.1 C20.1 C20.2 C22.1 C22.2 C23.1 P2.8 P2.15 P2.16 R5.1 TP1.1 U1.15 U2.7 U2.8 U2.9 U7.1 U7.3 U7.5 U7.7 U7.8 U10.1 U10.2 U10.3 U10.4 U10.7 U10.8 U10.9 U10.10 U10.15 U11.1 U11.5 U11.8 U11.9 U12.1 U12.5 U12.8 U12.9
copper on no net: | length 40.1
  GND w0.254: 6.691,-37.988 9.79,-34.889 ; 24.894,-53.429 26.191,-52.132 26.191,-18.288
  other v1: 7.028,26.035 8.128,26.035 9.228,26.035 0.678,26.162 1.778,26.162 2.878,26.162 7.028,27.135 8.128,27.135 9.228,27.135 0.678,27.262 1.778,27.262 2.878,27.262

## Polygon pours and split planes (outlines as drawn)
no net on Top Layer "GND" (solid, shelved, pour order 4): 7.493,45.085 7.493,44.958 7.493,10.16 5.475,10.16 5.475,-7.62 -5.588,-7.62 -5.588,10.16 -7.493,10.16 -7.493,45.212 7.493,45.212
Guard on Guard (split plane): 6.99,38.86 6.99,0.765 5.494,0.765 5.395,0.755 5.299,0.726 5.211,0.678 5.133,0.615 5.07,0.538 5.023,0.449 4.994,0.354 4.984,0.254 4.984,-22.096 -5.095,-22.096 -5.095,0.254 -5.105,0.354 -5.134,0.449 -5.181,0.538 -5.245,0.615 -5.322,0.678 -5.41,0.726 -5.506,0.755 -5.606,0.764 -6.99,0.764 -6.99,38.86

## Silkscreen, mask and mechanical layers (free items; w line width, h text height)
Top Overlay:
  text "Beam" at -1.905,41.402 h0.51
  text "Sense  / Plate" at -10.16,40.894 h0.51
  text "Forcing  / Plate" at 4.191,40.513 h0.51

## Dimensions
-5.606,-22.606 to -7.5,0.254 on Mechanical 13
-5.525,-22.581 to 5.574,-22.581 on Mechanical 13
-7.5,0.254 to -7.5,39.37 on Mechanical 13
-7.5,40 to 7.5,40 on Mechanical 13